# EAGLE board M253B (EAGLE 6.6.0)
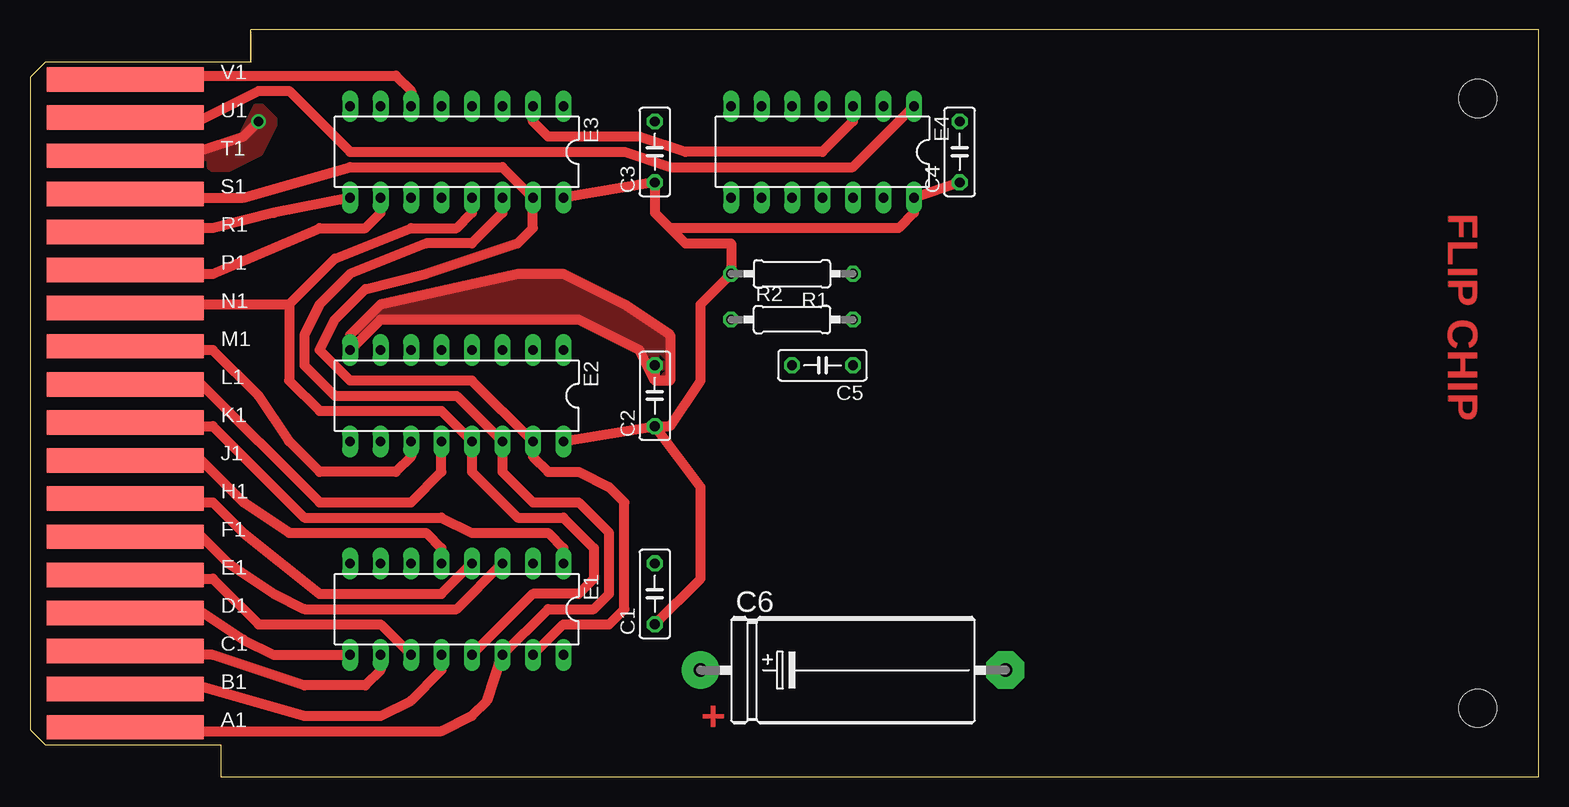
[diagram p0: board, top side]
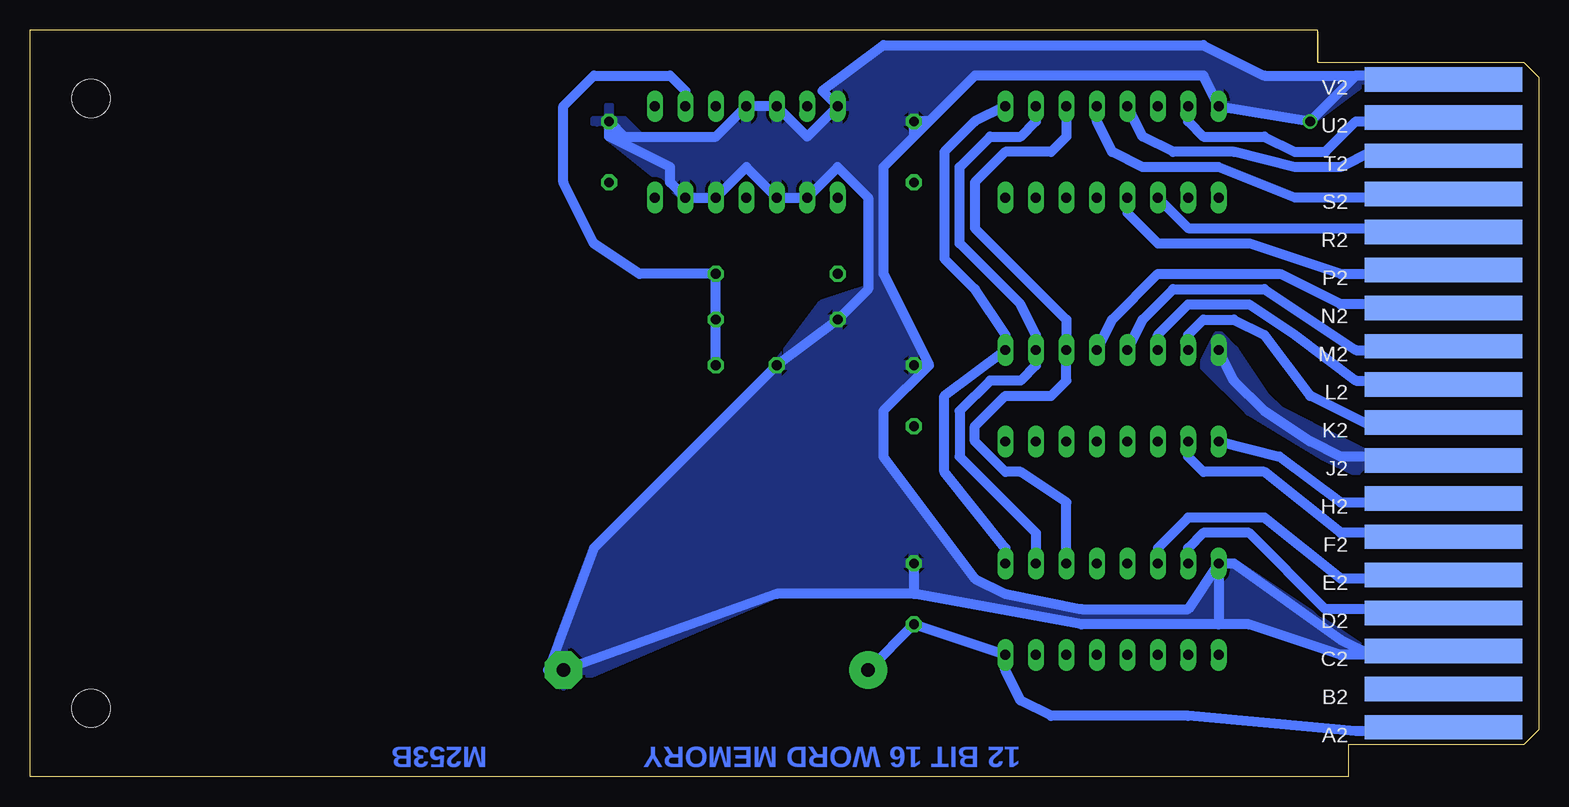
[diagram p1: board, bottom side, seen from below]

Size 125.73 x 62.23 mm. Coordinates in mm from the lower left corner, seen from the top.
Copper layers (1+16): Top 0.035mm / dielectric 1.5mm / Bottom 0.035mm
Design rules "16mils": minimum track width 16mil, minimum drill 32mil, track to track 15mil, track to pad 10mil, pad to pad 10mil, via to via 10mil, smd to smd 10mil, copper to edge 13mil, drill to drill 10mil, minimum pad ring 10mil, minimum via ring 8mil, stop-mask expansion 0mil, vias tented up to drill 0mil, thermal gap 10mil
Net classes: 0 default: width 0.813 mm

## Footprints (pad centres in the part's own frame; a part is rotated, then mirrored left to right if it is on the bottom)
C050-025X075 = drill 0.813 octagon: 1 -2.54,0; 2 2.54,0
E25-9 = drill 1.118 pad 3.15: + -12.7,0 | drill 1.118 pad 3.15 octagon: - 12.7,0
DIL16 = drill 0.813 long: 1 -8.89,-3.81; 2 -6.35,-3.81; 3 -3.81,-3.81; 4 -1.27,-3.81; 5 1.27,-3.81; 6 3.81,-3.81; 7 6.35,-3.81; 8 8.89,-3.81; 9 8.89,3.81; 10 6.35,3.81; 11 3.81,3.81; 12 1.27,3.81; 13 -1.27,3.81; 14 -3.81,3.81; 15 -6.35,3.81; 16 -8.89,3.81
DIL14 = drill 0.813 long: 1 -7.62,-3.81; 2 -5.08,-3.81; 3 -2.54,-3.81; 4 0,-3.81; 5 2.54,-3.81; 6 5.08,-3.81; 7 7.62,-3.81; 8 7.62,3.81; 9 5.08,3.81; 10 2.54,3.81; 11 0,3.81; 12 -2.54,3.81; 13 -5.08,3.81; 14 -7.62,3.81
0207/10 = drill 0.813 octagon: 1 -5.08,0; 2 5.08,0
SINGLE = hole 3.175: 120.65,56.515; 120.65,5.715
EDGE-CON2 = smd 13.106 x 2.032: A1 7.938,4.128; B1 7.938,7.303; C1 7.938,10.477; D1 7.938,13.652; E1 7.938,16.828; F1 7.938,20.003; H1 7.938,23.177; J1 7.938,26.352; K1 7.938,29.527; L1 7.938,32.703; M1 7.938,35.877; N1 7.938,39.053; P1 7.938,42.227; R1 7.938,45.403; S1 7.938,48.578; T1 7.938,51.752; U1 7.938,54.928; V1 7.938,58.102 | smd 13.106 x 2.032 bottom: A2 7.938,4.128; B2 7.938,7.303; C2 7.938,10.477; D2 7.938,13.652; E2 7.938,16.828; F2 7.938,20.003; H2 7.938,23.177; J2 7.938,26.352; K2 7.938,29.527; L2 7.938,32.703; M2 7.938,35.877; N2 7.938,39.053; P2 7.938,42.227; R2 7.938,45.403; S2 7.938,48.578; T2 7.938,51.752; U2 7.938,54.928; V2 7.938,58.102

## Placement (x,y rotation side)
C1  .01uF  [C050-025X075]  52.07,15.24 90 top
C2  .01uF  [C050-025X075]  52.07,31.75 90 top
C3  .01uF  [C050-025X075]  52.07,52.07 90 top
C4  .01uF  [C050-025X075]  77.47,52.07 90 top
C5  .01uF  [C050-025X075]  66.04,34.29 180 top
C6  68uF  [E25-9]  68.58,8.89 0 top
E1  7489  [DIL16]  35.56,13.97 180 top
E2  7489  [DIL16]  35.56,31.75 180 top
E3  7489  [DIL16]  35.56,52.07 180 top
E4  74H00N  [DIL14]  66.04,52.07 180 top
R1  330  [0207/10]  63.5,41.91 180 top
R2  750  [0207/10]  63.5,38.1 0 top
U$1  OUTLINE-SINGLE  [SINGLE]  0,0 0 top
U$2  [EDGE-CON2]  0,0 0 top

## Library data of the parts
C1-C6 R1 R2 = rcl
E1-E3 U$1 U$2 = dec-con
E4 = 74xx-us

## Nets
+3V3: C5.1 E4.2 R1.1 R2.2
CS: E4.1 U$2.U1
GND: C1.2 C2.2 C3.2 C4.2 C5.2 C6.- E1.8 E2.8 E3.8 E4.4 E4.5 E4.7 E4.9 E4.10 E4.12 E4.13 R2.1 U$2.C2 U$2.J2 U$2.T1 U$2.V2
N$1: E1.2 E2.2 E3.2 E4.3
N$2: E1.1 E2.1 E3.1 U$2.K1
N$3: E1.14 E2.14 E3.14 U$2.A1
N$4: E1.13 E2.13 E3.13 U$2.N1
N$5: E1.3 E2.3 E3.3 U$2.F1
N$6: E1.15 E2.15 E3.15 U$2.S1
N$7: E1.6 U$2.E2
N$8: E1.4 U$2.H1
N$9: E1.10 U$2.C1
N$10: E1.12 U$2.B1
N$11: E2.6 U$2.L2
N$12: E2.4 U$2.N2
N$13: E2.10 U$2.F2
N$14: E2.12 U$2.L1
N$15: E3.12 U$2.P2
N$16: E3.4 U$2.S2
N$17: E3.10 U$2.P1
N$18: E3.6 U$2.V1
N$19: E1.7 U$2.D2
N$20: E1.5 U$2.J1
N$21: E1.11 U$2.E1
N$22: E1.9 U$2.D1
N$23: E2.5 U$2.M2
N$24: E2.7 U$2.K2
N$25: E2.9 U$2.H2
N$26: E2.11 U$2.M1
N$27: E3.11 U$2.R2
N$28: E3.5 U$2.T2
N$29: E3.7 U$2.U2
N$30: E3.9 U$2.R1
VCC: C1.1 C2.1 C3.1 C4.1 C6.+ E1.16 E2.16 E3.16 E4.14 R1.2 U$2.A2

## Tracks (layer width: path | path; a pad name or v marks a point on that pad's centre or on a via)
+3V3
  Bottom 0.813: C5.1 R2.2 R1.1 74.93,41.91 78.74,44.45 81.28,49.53 81.28,55.88 78.74,58.42 72.39,58.42 71.12,57.15 E4.2
CS
  Top 0.813: U$2.U1 8.89,54.61 13.97,54.61 19.05,57.15 21.59,57.15 26.67,52.07 49.53,52.07 53.34,50.8 68.58,50.8 E4.1
GND  (via drill 0.81)
  Top 0.813: U$2.T1 8.89,52.07 13.97,52.07 17.78,53.34 v19.05,54.61 | 52.07,33.02 53.34,33.02 53.34,36.83 49.53,39.37 44.45,41.91 40.64,41.91 29.21,39.37 26.67,36.83 E2.8 29.21,38.1 45.72,38.1 50.8,35.56 52.07,33.02 | C2.2 52.07,33.02
  Bottom 0.813: U$2.C2 8.89,10.48 8.89,10.16 13.97,10.16 | 13.97,10.16 16.51,10.16 24.13,12.7 26.67,12.7 | 26.67,12.7 38.1,12.7 52.07,15.24 | 52.07,15.24 63.5,15.24 C6.- 82.55,8.89 78.74,19.05 C5.2 R2.1 55.88,40.64 55.88,48.26 58.42,50.8 E4.9 E4.10 66.04,50.8 E4.12 E4.13 72.39,49.53 72.39,50.8 77.47,53.34 C4.2 76.2,53.34 68.58,53.34 E4.4 E4.5 60.96,53.34 E4.7 59.69,57.15 54.61,60.96 27.94,60.96 22.86,58.42 15.24,58.42 | C1.2 52.07,15.24 | E1.8 26.67,12.7 | U$2.J2 10.16,26.67 16.51,26.67 19.05,27.94 22.86,30.48 25.4,33.02 E2.8 | U$2.V2 8.89,58.42 15.24,58.42 | 15.24,58.42 v19.05,54.61 E3.8 27.94,58.42 46.99,58.42 50.8,54.61 | 50.8,54.61 C3.2 52.07,53.34 | 52.07,53.34 54.61,50.8 54.61,41.91 50.8,34.29 | 52.07,53.34 50.8,54.61 | C2.2 50.8,34.29 | 50.8,34.29 54.61,30.48 54.61,26.67 46.99,16.51 44.45,15.24 38.1,13.97 29.21,13.97 E1.8 | E1.8 25.4,17.78 16.51,11.43 13.97,10.16
  pour Bottom: 63.5,15.24 81.28,7.62 82.55,8.89 78.74,19.05 63.5,34.29 59.69,39.37 55.88,40.64 55.88,48.26 58.42,50.8 60.96,48.26 63.5,48.26 66.04,50.8 68.58,48.26 71.12,48.26 77.47,53.34 78.74,54.61 77.47,55.88 74.93,53.34 68.58,53.34 66.04,55.88 63.5,55.88 60.96,53.34 58.42,55.88 59.69,57.15 54.61,60.96 27.94,60.96 22.86,58.42 13.97,58.42 19.05,54.61 26.67,55.88 27.94,58.42 46.99,58.42 54.61,50.8 54.61,41.91 50.8,34.29 54.61,30.48 54.61,26.67 46.99,16.51 44.45,15.24 38.1,13.97 29.21,13.97 26.67,17.78 25.4,17.78 13.97,10.16 16.51,10.16 24.13,12.7 38.1,12.7 52.07,15.24
  pour Bottom (no thermals): 13.97,26.67 15.24,25.4 17.78,26.67 24.13,30.48 27.94,34.29 26.67,36.83 25.4,35.56 22.86,31.75 21.59,30.48 19.05,29.21 16.51,27.94
  pour Top: 26.67,35.56 29.21,38.1 45.72,38.1 50.8,35.56 52.07,33.02 53.34,33.02 53.34,36.83 49.53,39.37 44.45,41.91 40.64,41.91 29.21,39.37 26.67,36.83
  pour Top: 13.97,52.07 17.78,53.34 19.05,55.88 20.32,54.61 19.05,52.07 16.51,50.8 15.24,50.8
N$1
  Top 0.813: E4.3 68.58,54.61 66.04,52.07 54.61,52.07 50.8,53.34 43.18,53.34 41.91,54.61 E3.2
  Bottom 0.813: E1.2 41.91,20.32 48.26,26.67 48.26,30.48 45.72,33.02 43.18,33.02 41.91,34.29 E2.2 41.91,36.83 43.18,39.37 48.26,44.45 48.26,50.8 45.72,53.34 43.18,53.34 41.91,54.61 E3.2
N$2
  Top 0.813: U$2.K1 8.89,29.21 15.24,29.21 22.86,21.59 34.29,21.59 36.83,20.32 43.18,20.32 44.45,19.05 E1.1
  Bottom 0.813: E1.1 44.45,19.05 49.53,25.4 49.53,31.75 E2.1 44.45,36.83 46.99,40.64 49.53,43.18 49.53,52.07 46.99,54.61 E3.1
N$3
  Top 0.813: U$2.A1 10.16,3.81 34.29,3.81 36.83,5.08 38.1,6.35 E1.14 43.18,13.97 46.99,13.97 48.26,15.24 48.26,20.32 45.72,22.86 41.91,22.86 39.37,25.4 E2.14 35.56,31.75 25.4,31.75 22.86,34.29 22.86,36.83 24.13,39.37 26.67,41.91 33.02,44.45 36.83,44.45 39.37,46.99 E3.14
N$4
  Top 0.813: U$2.N1 8.89,39.37 21.59,39.37 | 21.59,39.37 21.59,33.02 24.13,30.48 34.29,30.48 E2.13 36.83,25.4 40.64,21.59 44.45,21.59 46.99,19.05 46.99,16.51 45.72,15.24 41.91,15.24 E1.13 | 21.59,39.37 25.4,43.18 31.75,45.72 35.56,45.72 36.83,46.99 E3.13
N$5
  Top 0.813: U$2.F1 8.89,20.32 13.97,20.32 16.51,17.78 20.32,15.24 22.86,13.97 35.56,13.97 E1.3
  Bottom 0.813: E1.3 39.37,22.86 43.18,25.4 44.45,25.4 46.99,27.94 46.99,29.21 44.45,31.75 40.64,31.75 39.37,33.02 E2.3 39.37,38.1 46.99,45.72 46.99,49.53 44.45,52.07 40.64,52.07 39.37,53.34 E3.3
N$6
  Top 0.813: U$2.S1 8.89,48.26 17.78,48.26 26.67,50.8 39.37,50.8 E3.15 41.91,45.72 40.64,44.45 33.02,41.91 27.94,40.64 25.4,38.1 24.13,35.56 26.67,33.02 36.83,33.02 E2.15 41.91,26.67 43.18,25.4 45.72,25.4 48.26,24.13 49.53,22.86 49.53,13.97 48.26,12.7 44.45,12.7 E1.15
N$7
  Bottom 0.813: U$2.E2 8.89,16.51 16.51,16.51 22.86,21.59 29.21,21.59 31.75,19.05 E1.6
N$8
  Top 0.813: U$2.H1 8.89,22.86 15.24,22.86 17.78,20.32 24.13,15.24 34.29,15.24 E1.4
N$9
  Top 0.813: E1.10 29.21,8.89 27.94,7.62 22.86,7.62 15.24,10.16 8.89,10.16 U$2.C1
N$10
  Top 0.813: U$2.B1 8.89,7.62 13.97,7.62 22.86,5.08 29.21,5.08 31.75,6.35 34.29,8.89 E1.12
N$11
  Bottom 0.813: E2.6 31.75,36.83 29.21,39.37 24.13,39.37 20.32,36.83 15.24,33.02 8.89,33.02 U$2.L2
N$12
  Bottom 0.813: U$2.N2 8.89,39.37 16.51,39.37 21.59,41.91 31.75,41.91 35.56,38.1 E2.4
N$13
  Bottom 0.813: U$2.F2 8.89,20.32 16.51,20.32 22.86,25.4 27.94,25.4 29.21,26.67 E2.10
N$14
  Top 0.813: U$2.L1 8.89,33.02 13.97,33.02 24.13,22.86 31.75,22.86 34.29,25.4 E2.12
N$15
  Bottom 0.813: E3.12 34.29,46.99 31.75,44.45 24.13,44.45 16.51,41.91 8.89,41.91 U$2.P2
N$16
  Bottom 0.813: U$2.S2 10.16,48.26 20.32,48.26 26.67,50.8 33.02,50.8 35.56,52.07 36.83,54.61 E3.4
N$17
  Top 0.813: U$2.P1 8.89,41.91 15.24,41.91 24.13,45.72 27.94,45.72 29.21,46.99 E3.10
N$18
  Top 0.813: U$2.V1 10.16,58.42 30.48,58.42 31.75,57.15 E3.6
N$19
  Bottom 0.813: U$2.D2 11.43,13.97 17.78,13.97 24.13,20.32 27.94,20.32 29.21,19.05 E1.7
N$20
  Top 0.813: U$2.J1 8.89,26.67 13.97,26.67 17.78,22.86 21.59,20.32 33.02,20.32 34.29,19.05 E1.5
N$21
  Top 0.813: U$2.E1 8.89,16.51 15.24,16.51 19.05,12.7 29.21,12.7 E1.11
N$22
  Top 0.813: U$2.D1 8.89,13.97 13.97,13.97 17.78,11.43 20.32,10.16 E1.9
N$23
  Bottom 0.813: E2.5 33.02,38.1 30.48,40.64 22.86,40.64 15.24,35.56 8.89,35.56 U$2.M2
N$24
  Bottom 0.813: U$2.K2 10.16,29.21 13.97,29.21 19.05,31.75 22.86,36.83 25.4,38.1 27.94,38.1 29.21,36.83 E2.7
N$25
  Bottom 0.813: E2.9 21.59,26.67 16.51,22.86 8.89,22.86 U$2.H2
N$26
  Top 0.813: E2.11 31.75,26.67 30.48,25.4 24.13,25.4 21.59,27.94 19.05,31.75 15.24,35.56 8.89,35.56 U$2.M1
N$27
  Bottom 0.813: E3.11 29.21,45.72 8.89,45.72 U$2.R2
N$28
  Bottom 0.813: U$2.T2 8.89,52.07 13.97,52.07 16.51,50.8 20.32,50.8 25.4,52.07 30.48,52.07 33.02,53.34 E3.5
N$29
  Bottom 0.813: E3.7 29.21,54.61 27.94,53.34 22.86,53.34 20.32,52.07 17.78,52.07 15.24,54.61 8.89,54.61 U$2.U2
N$30
  Top 0.813: E3.9 20.32,46.99 15.24,45.72 8.89,45.72 U$2.R1
VCC
  Top 0.813: C1.1 55.88,16.51 55.88,24.13 C2.1 | E2.16 C2.1 | E3.16 C3.1 52.07,46.99 53.34,45.72 | 53.34,45.72 54.61,44.45 58.42,44.45 R1.2 55.88,39.37 55.88,33.02 53.34,29.21 C2.1 | 53.34,45.72 72.39,45.72 73.66,46.99 E4.14 C4.1
  Bottom 0.813: C6.+ C1.1 E1.16 44.45,8.89 43.18,6.35 40.64,5.08 29.21,5.08 15.24,3.81 10.16,3.81 U$2.A2

## Text on the board
Top: FLIP CHIP | +
Bottom: 12 BIT 16 WORD MEMORY | M253B